# EAGLE board Schematic IOT Project v47 (EAGLE 9.7.0)
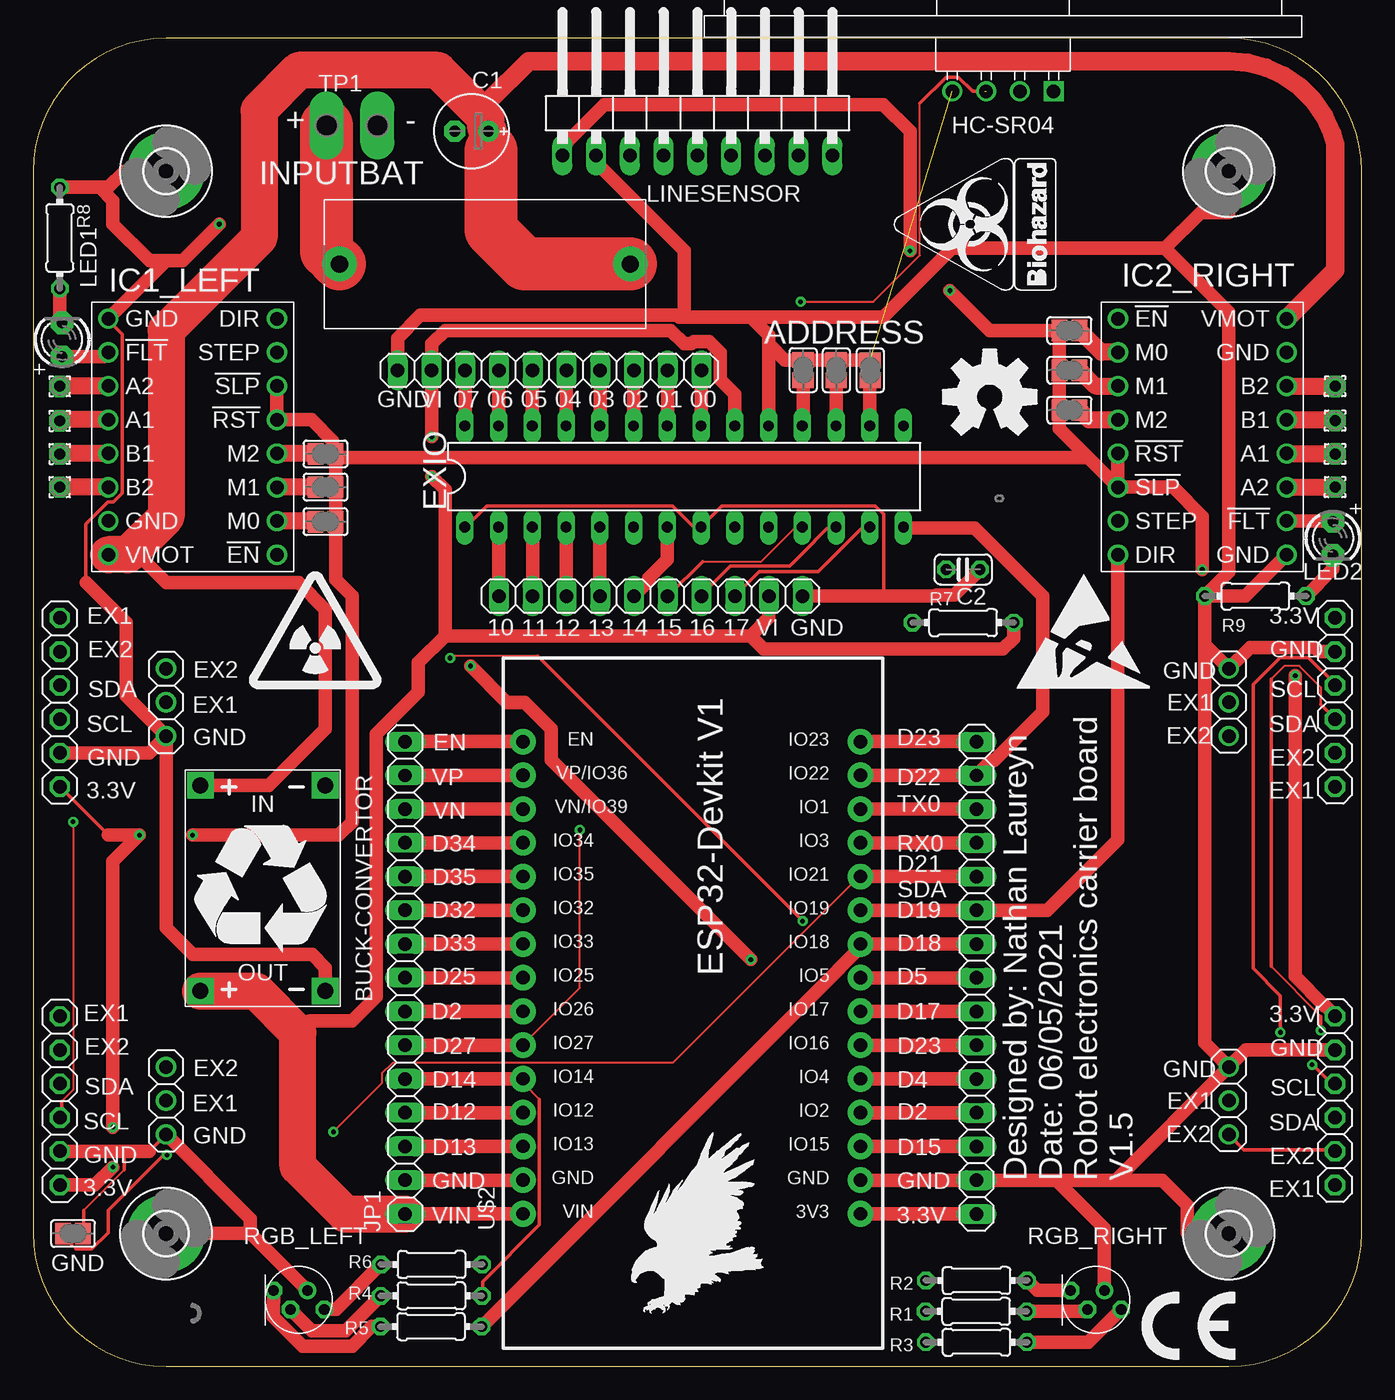
[diagram p0: board, top side]
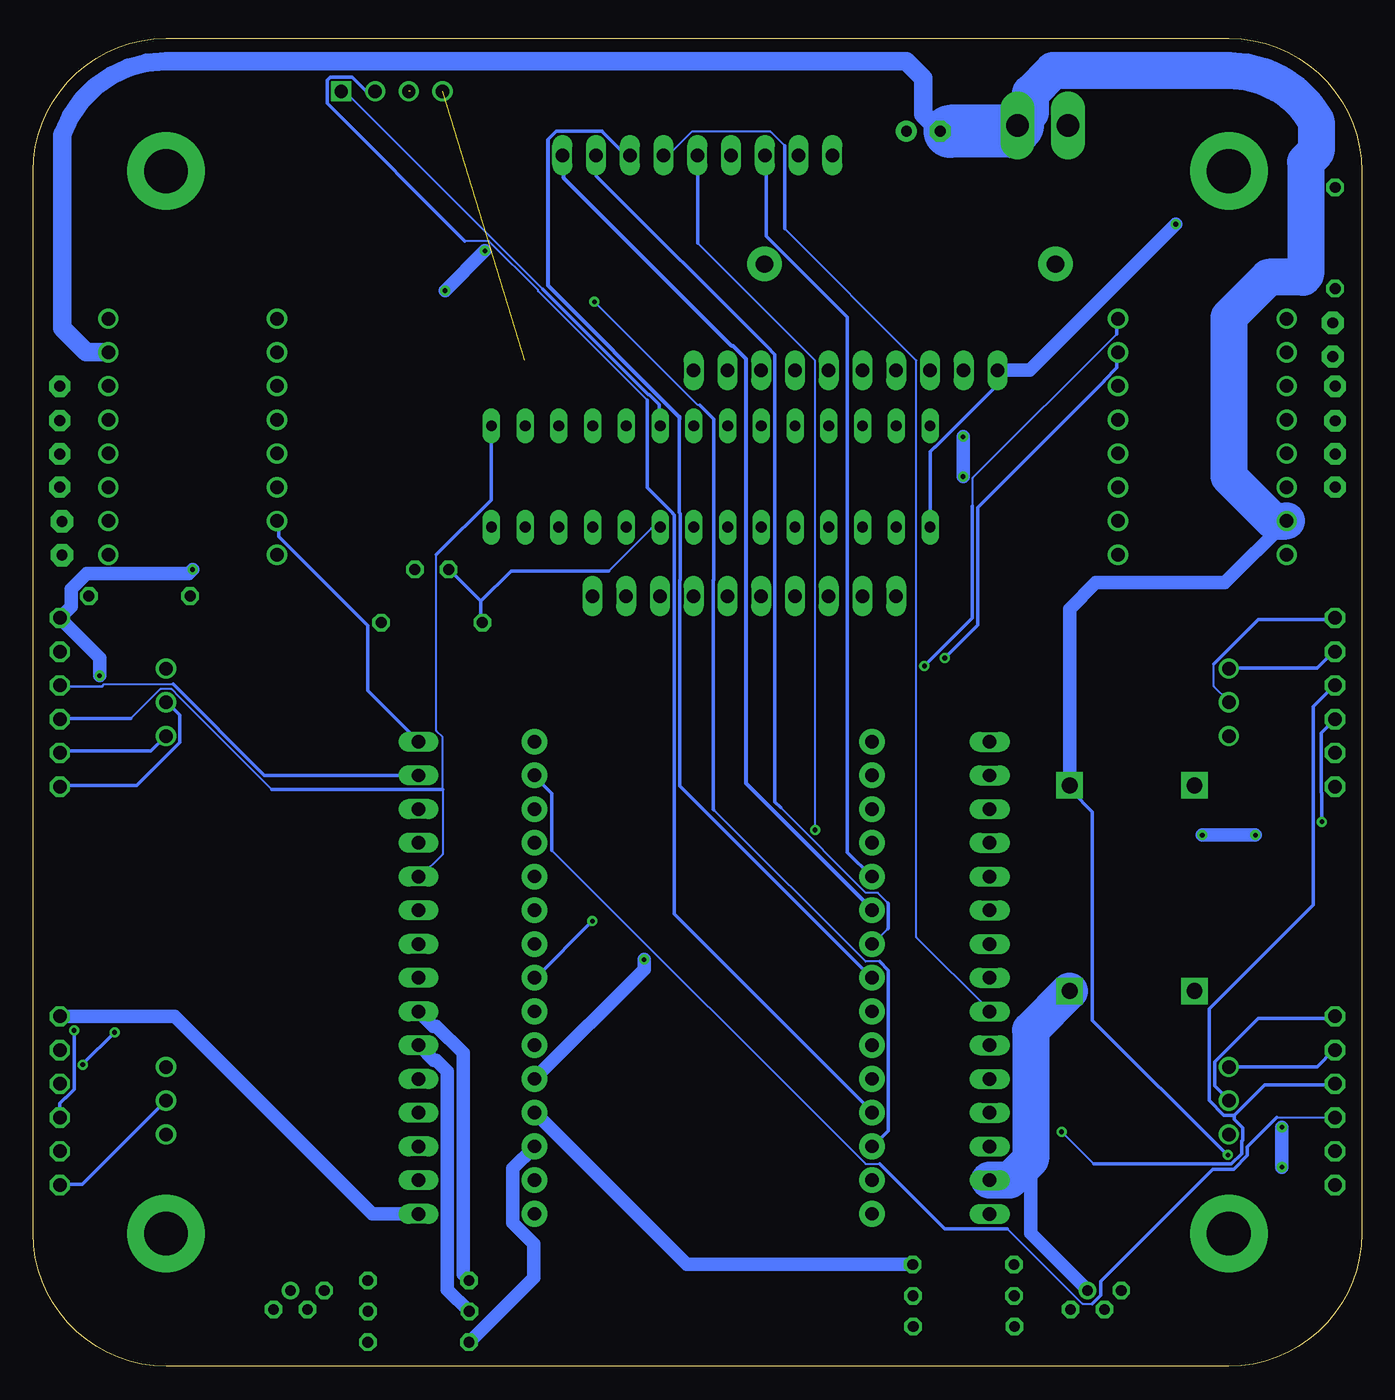
[diagram p1: board, bottom side, seen from below]

Size 100 x 100 mm. Coordinates in mm from the lower left corner, seen from the top.
Outline: 90,100 10,100 arc90 0,90 0,10 arc90 10,0 90,0 arc90 100,10 100,90 arc90 90,100
Copper layers (1*16): Top 0.035mm / dielectric 1.5mm / Bottom 0.035mm
Design rules "default": minimum track width 6mil, minimum drill 0.35mm, track to track 6mil, track to pad 6mil, pad to pad 6mil, via to via 6mil, smd to smd 6mil, copper to edge 40mil, drill to drill 6mil, minimum pad ring 10mil, minimum via ring 8mil, stop-mask expansion 4mil, vias tented up to drill 0mil, thermal gap 10mil

## Footprints (pad centres in the part's own frame; a part is rotated, then mirrored left to right if it is on the bottom)
DC-DC-STEP-DOWN-MP2307 = drill 1.2 pad 2 square: IN+ -7.747,-4.699; IN- -7.747,4.699; OUT+ 7.747,-4.699; OUT- 7.747,4.699
E2,5-6E = drill 0.813 pad 1.575: + -1.27,0 | drill 0.813 pad 1.575 octagon: - 1.27,0
C025-024X044 = drill 0.813 octagon: 1 -1.27,0; 2 1.27,0
DIL28-3 = drill 0.813 long: 1 -16.51,-3.81; 2 -13.97,-3.81; 3 -11.43,-3.81; 4 -8.89,-3.81; 5 -6.35,-3.81; 6 -3.81,-3.81; 7 -1.27,-3.81; 8 1.27,-3.81; 9 3.81,-3.81; 10 6.35,-3.81; 11 8.89,-3.81; 12 11.43,-3.81; 13 13.97,-3.81; 14 16.51,-3.81; 15 16.51,3.81; 16 13.97,3.81; 17 11.43,3.81; 18 8.89,3.81; 19 6.35,3.81; 20 3.81,3.81; 21 1.27,3.81; 22 -1.27,3.81; 23 -3.81,3.81; 24 -6.35,3.81; 25 -8.89,3.81; 26 -11.43,3.81; 27 -13.97,3.81; 28 -16.51,3.81
SJ = smd 1.168 x 1.6: 1 -0.762,0; 2 0.762,0
3,3-PAD = drill 3.3 pad 5.842: B3,3 0,0
ULTRASONIC-HC-SR04#V = drill 1 square: 1 -3.81,0 | drill 1: 2 -1.27,0; 3 1.27,0; 4 3.81,0
DRV8825 = drill 1.016: 1 -6.35,8.89; 2 -6.35,6.35; 3 -6.35,3.81; 4 -6.35,1.27; 5 -6.35,-1.27; 6 -6.35,-3.81; 7 -6.35,-6.35; 8 -6.35,-8.89; 9 6.35,-8.89; 10 6.35,-6.35; 11 6.35,-3.81; 12 6.35,-1.27; 13 6.35,1.27; 14 6.35,3.81; 15 6.35,6.35; 16 6.35,8.89
4527 = drill 1.3 pad 2.6: 1 -10.95,0; 2 10.95,0
1X15 = drill 1.016 long: 1 -17.78,0; 2 -15.24,0; 3 -12.7,0; 4 -10.16,0; 5 -7.62,0; 6 -5.08,0; 7 -2.54,0; 8 0,0; 9 2.54,0; 10 5.08,0; 11 7.62,0; 12 10.16,0; 13 12.7,0; 14 15.24,0; 15 17.78,0
1X06 = drill 1.016 octagon: 1 -6.35,0; 2 -3.81,0; 3 -1.27,0; 4 1.27,0; 5 3.81,0; 6 6.35,0
1X03 = drill 1.016: 1 -2.54,0; 2 0,0; 3 2.54,0
1X10 = drill 1.016 long: 1 -11.43,0; 2 -8.89,0; 3 -6.35,0; 4 -3.81,0; 5 -1.27,0; 6 1.27,0; 7 3.81,0; 8 6.35,0; 9 8.89,0; 10 11.43,0
LED3MM = drill 0.813 pad 1.676 octagon: A -1.27,0; K 1.27,0
1X09/90 = drill 1.016 long: 1 -10.16,-3.81; 2 -7.62,-3.81; 3 -5.08,-3.81; 4 -2.54,-3.81; 5 0,-3.81; 6 2.54,-3.81; 7 5.08,-3.81; 8 7.62,-3.81; 9 10.16,-3.81
1,6/0,8 = drill 0.813 pad 1.6 octagon: 1 0,0
0204/7 = drill 0.813 octagon: 1 -3.81,0; 2 3.81,0
LED5MMRGB = drill 0.8 pad 0.813 octagon: P$1 -1.905,0.714; P$2 -0.635,-0.714; P$4 1.905,-0.714 | drill 0.8 pad 0.813: P$3 0.635,0.714
P2-38-17 = drill 1.702 pad 2.121 long: TP-1 -1.905,0; TP-2 1.905,0
ESP32-DEVKITV1 = drill 1 pad 1.93: 3V3 -16.52,-12.27; D1 13.96,-12.27; D2 -8.9,-12.27; D3 11.42,-12.27; D4 -6.36,-12.27; D5 1.26,-12.27; D12 -8.9,13.135; D13 -11.44,13.135; D14 -6.36,13.135; D15 -11.44,-12.27; D16 -3.82,-12.27; D17 -1.28,-12.27; D18 3.8,-12.27; D19 6.34,-12.27; D21 8.88,-12.27; D22 16.5,-12.27; D23 19.04,-12.27; D25 1.26,13.135; D26 -1.28,13.135; D27 -3.82,13.135; D32 6.34,13.135; D33 3.8,13.135; D34 11.42,13.135; D35 8.88,13.135; D36 16.5,13.135; D39 13.96,13.135; EN 19.04,13.135; GND@1 -13.98,13.135; GND@2 -13.98,-12.27; VIN -16.52,13.135

## Placement (x,y rotation side)
BUCK-CONVERTOR  DC-DC-STEP-DOWN  [DC-DC-STEP-DOWN-MP2307]  17.29,36 270 top
C1  [E2,5-6E]  33,93 180 top
C2  33pF  [C025-024X044]  70,60 180 top
EXIO  MCP23016P  [DIL28-3]  49,67 0 top
GND  [SJ]  3,10 0 top
H1  MOUNT-PAD-ROUND3.3  [3,3-PAD]  10,90 0 top
H2  MOUNT-PAD-ROUND3.3  [3,3-PAD]  90,90 0 top
H3  MOUNT-PAD-ROUND3.3  [3,3-PAD]  10,10 0 top
H4  MOUNT-PAD-ROUND3.3  [3,3-PAD]  90,10 0 top
HC-SR04  ULTRASONIC-HC-SR04#V  [ULTRASONIC-HC-SR04#V]  73,96 180 top
IC1_LEFT  2987-DRV8825  [DRV8825]  12,70 180 top
IC2_RIGHT  2987-DRV8825  [DRV8825]  88,70 0 top
INPUTBAT  4527  [4527]  34,83 0 top
JP1  [1X15]  28,29.25 90 top
JP2  [1X15]  71,29.25 270 top
JP3  [1X06]  98,50 270 top
JP4  [1X03]  90,50 270 top
JP5  [1X06]  98,20 270 top
JP6  [1X03]  90,20 270 top
JP7  [1X06]  2,50 90 top
JP8  [1X03]  10,50 90 top
JP9  [1X06]  2,20 90 top
JP10  [1X03]  10,20 90 top
JP11  PINHD-1X10  [1X10]  46.48,58 180 top
JP12  PINHD-1X10  [1X10]  38.86,75 180 top
LED1  [LED3MM]  2.17,77.31 90 top
LED2  [LED3MM]  97.83,62.35 270 top
LINESENSOR  PINHD-1X9/90  [1X09/90]  50,95 0 top
PAD1  [1,6/0,8]  98,73.8 0 top
PAD2  [1,6/0,8]  98,71.21 0 top
PAD3  [1,6/0,8]  98,68.7 0 top
PAD4  [1,6/0,8]  98,66.2 0 top
PAD5  [1,6/0,8]  2,66.2 180 top
PAD6  [1,6/0,8]  2,68.7 180 top
PAD7  [1,6/0,8]  2,71.2 180 top
PAD8  [1,6/0,8]  2,73.8 180 top
R1  15Ω  [0204/7]  70.99,4.14 0 top
R2  15Ω  [0204/7]  71,6.46 0 top
R3  82Ω  [0204/7]  71,1.82 0 top
R4  15Ω  [0204/7]  29.97,5.3 180 top
R5  15Ω  [0204/7]  29.95,2.99 180 top
R6  82Ω  [0204/7]  29.99,7.66 180 top
R7  3k9Ω  [0204/7]  70,56 0 top
R8  82Ω  [0204/7]  2,84.96 270 top
R9  82Ω  [0204/7]  92,58 0 top
RGB_LEFT  5MMRGBLED  [LED5MMRGB]  20,5 0 top
RGB_RIGHT  5MMRGBLED  [LED5MMRGB]  80,5 0 top
SJ1  [SJ]  22,68.7 180 top
SJ2  [SJ]  22,66.2 180 top
SJ3  [SJ]  22,63.6 180 top
SJ4  [SJ]  78,72 0 top
SJ5  [SJ]  78,75 0 top
SJ6  [SJ]  78,78 0 top
SJ12  [SJ]  57.95,75.02 270 top
SJ13  [SJ]  60.45,75.01 270 top
SJ14  [SJ]  63,75 270 top
TP1  TP2P2-38-17  [P2-38-17]  24,93.43 0 top
U$1  [LOGO]  69,65 0 top
U$2  ESP32DEVKITV1  [ESP32-DEVKITV1]  50,28 90 top
U$3  [CE_5MM]  83.44,0.51 0 top
U$4  [BIOHAZARD_10.00]  77,81 90 top
U$5  [ESD_10.00]  74,51 0 top
U$6  [OSHW-LOGO-L]  72,73 0 top
U$7  [EAGLE-PLC-10MM]  45,4 0 top
U$8  [RADIOACTIVE_10.00]  16,51 0 top
U$9  [RECYCLING_10.00]  12,31 0 top
U$10  [LOGO02]  14,4 0 top

## Library data of the parts
BUCK-CONVERTOR HC-SR04 = diy-modules
C1 C2 = rcl; SPICEPREFIX: C
EXIO = microchip-dspic
GND SJ1-SJ6 SJ12-SJ14 = jumper
H1-H4 = holes
IC1_LEFT IC2_RIGHT = pololu-stepper-driver
INPUTBAT = Fuse Holder; CREATED_BY: PCBLayout.com; DIGIKEY_PN: 36-4527-ND; MANUFACTURER: Keystone Electronics; MPN: 4527
JP1-JP10 LED1 LED2 = adafruit
JP11 JP12 LINESENSOR = Connector; CATEGORY: CONNECTOR; SUB-CATEGORY: PIN-HEADER
PAD1-PAD8 = wirepad
R1-R9 = rcl; SPICEPREFIX: R
RGB_LEFT RGB_RIGHT = led_rgb
TP1 = testpad
U$1 = microchip
U$2 = ESP32-DEVKITV1 updated
U$3-U$5 U$7-U$9 = logo
U$6 = SparkFun-Aesthetics
U$10 = am29-memory

## Nets
+3V3: IC1_LEFT.5 IC1_LEFT.6 IC2_RIGHT.5 IC2_RIGHT.6 JP2.15 JP3.1 JP5.1 JP7.1 JP9.1 LINESENSOR.1 SJ1.1 SJ2.1 SJ3.1 SJ4.1 SJ5.1 SJ6.1 U$2.3V3
+12VF: BUCK-CONVERTOR.IN+ C1.+ IC1_LEFT.16 IC2_RIGHT.16 INPUTBAT.2
AGND: BUCK-CONVERTOR.IN- C1.- GND.1 IC1_LEFT.15 IC2_RIGHT.15 TP1.TP-2
AN: JP1.11 LINESENSOR.3 U$2.D35
CAL: LINESENSOR.4
D1: JP1.6 LINESENSOR.5 U$2.D27
D2: JP1.7 LINESENSOR.6 U$2.D26
D3: JP1.8 LINESENSOR.7 U$2.D25
D4: JP1.9 LINESENSOR.8 U$2.D33
D5: JP1.10 LINESENSOR.9 U$2.D32
ECHO_13: HC-SR04.3 JP1.3 U$2.D13
GNDIO: BUCK-CONVERTOR.OUT- C2.1 EXIO.1 EXIO.8 EXIO.19 GND.2 H1.B3,3 H2.B3,3 H3.B3,3 H4.B3,3 HC-SR04.4 IC1_LEFT.9 IC2_RIGHT.9 JP1.2 JP2.14 JP3.2 JP4.1 JP5.2 JP6.1 JP7.2 JP8.1 JP9.2 JP10.1 JP11.1 JP12.10 LINESENSOR.2 R8.1 R9.1 RGB_LEFT.P$3 RGB_RIGHT.P$3 SJ12.1 SJ13.1 SJ14.1 U$2.GND@1 U$2.GND@2
GP0.0: EXIO.21 JP12.1
GP0.1: EXIO.22 JP12.2
GP0.2: EXIO.23 JP12.3
GP0.3: EXIO.24 JP12.4
GP0.4: EXIO.25 JP12.5
GP0.5: EXIO.26 JP12.6
GP0.6: EXIO.27 JP12.7
GP0.7: EXIO.28 JP12.8
GP1.0: EXIO.2 JP11.10
GP1.1: EXIO.3 JP11.9
GP1.2: EXIO.4 JP11.8
GP1.3: EXIO.5 JP11.7
GP1.4: EXIO.7 JP11.6
GP1.5: EXIO.11 JP11.5
GP1.6: EXIO.12 JP11.4
GP1.7: EXIO.13 JP11.3
IO23: IC2_RIGHT.7 JP2.1 U$2.D23
N$1: R3.2 RGB_RIGHT.P$4
N$2: R1.2 RGB_RIGHT.P$2
N$3: IC1_LEFT.7 JP2.8 U$2.D5
N$4: IC2_RIGHT.8 JP2.6 U$2.D19
N$5: R2.2 RGB_RIGHT.P$1
N$6: IC1_LEFT.8 JP2.11 U$2.D4
N$7: R4.2 RGB_LEFT.P$2
N$8: IC1_LEFT.4 SJ1.2
N$9: IC1_LEFT.3 SJ2.2
N$10: IC1_LEFT.2 SJ3.2
N$11: R5.2 RGB_LEFT.P$1
N$12: R6.2 RGB_LEFT.P$4
N$14: IC2_RIGHT.4 SJ4.2
N$15: IC2_RIGHT.3 SJ5.2
N$16: IC2_RIGHT.2 SJ6.2
N$17: IC2_RIGHT.14 PAD1.1
N$18: IC2_RIGHT.13 PAD2.1
N$19: IC2_RIGHT.12 PAD3.1
N$20: IC2_RIGHT.11 PAD4.1
N$21: IC1_LEFT.14 PAD5.1
N$22: IC1_LEFT.13 PAD6.1
N$23: IC1_LEFT.12 PAD7.1
N$24: IC1_LEFT.11 PAD8.1
N$25: LED1.K R8.2
N$26: IC1_LEFT.10 LED1.A
N$27: LED2.K R9.2
N$28: JP2.3 U$2.D1
N$29: JP2.4 U$2.D3
N$30: IC2_RIGHT.10 LED2.A
N$31: JP1.15 U$2.EN
N$32: JP1.14 U$2.D36
N$33: JP1.13 U$2.D39
N$34: JP1.12 U$2.D34
N$36: JP5.5 JP6.3
N$37: JP5.6 JP6.2
N$38: JP3.5 JP4.3
N$40: JP3.6 JP4.2
N$41: JP7.5 JP8.3
N$42: JP7.6 JP8.2
N$44: JP9.5 JP10.3
N$45: JP9.6 JP10.2
N$54: C2.2 EXIO.9 R7.1
N$55: INPUTBAT.1 TP1.TP-1
N$56: EXIO.18 SJ12.2
N$57: EXIO.17 SJ13.2
N$58: EXIO.16 SJ14.2
RGBB1: JP2.9 R2.1 U$2.D17
RGBB2: JP2.7 R5.1 U$2.D18
RGBG1: JP2.10 R1.1 U$2.D16
RGBG2: JP1.5 R4.1 U$2.D14
RGBR1: JP2.13 R3.1 U$2.D15
RGBR2: JP2.12 R6.1 U$2.D2
SCL: EXIO.14 JP2.2 JP3.3 JP5.3 JP7.3 JP9.3 U$2.D22
SDA: EXIO.15 JP2.5 JP3.4 JP5.4 JP7.4 JP9.4 U$2.D21
TRIG_12: HC-SR04.2 JP1.4 U$2.D12
VIN: BUCK-CONVERTOR.OUT+ EXIO.20 HC-SR04.1 JP1.1 JP11.2 JP12.9 R7.2 U$2.VIN

## Tracks (layer width: path | path; a pad name or v marks a point on that pad's centre or on a via)
+3V3  (via drill 0.35)
  Top 0.254: 5.65,40 JP7.1
  Top 1: U$2.3V3 JP2.15 | v88,60 88,64 85.81,66.19 IC2_RIGHT.6 | IC2_RIGHT.6 79.42,68.42 | 79.42,68.42 77.24,70.6 SJ4.1 SJ5.1 SJ6.1 72,78 v69,81 | v66,84 66,93 64,95 43,95 39.84,91.84 LINESENSOR.1 | 79.42,68.42 23.04,68.42 SJ1.1 | SJ1.1 22.52,68.94 22.52,69.72 20.98,71.27 IC1_LEFT.5 IC1_LEFT.6 | SJ1.1 SJ2.1 SJ3.1 22.76,59.24 24,58 24,41 23,40 v12,40 | IC2_RIGHT.6 IC2_RIGHT.5 | 5.65,40 v8,40 6,38 v6,18 | JP9.1 4.65,13.65 v6,15
  Top 1.016: v95,52 95,29.35 97.2,27.15 97.25,27.15 97.71,26.69 97.71,26.64 JP5.1
  Bottom 1: JP2.15 74.47,11.47 89.35,26.35 JP5.1 | v95,52 95,53.35 JP3.1 97.12,57.23 97.12,58.54 95.97,59.7 88.3,59.7 v88,60 | v69,81 v66,84 | v12,40 v8,40 | v6,15 v6,18
+12VF
  Top 0.152: 34.44,91.56 34.44,91.75 C1.+
  Top 1: IC1_LEFT.16 7.89,61.11 10,59 20,59 22,57 22,48 17.75,43.75 BUCK-CONVERTOR.IN+
  Top 1.4: C1.+ 34.27,95.27 37.28,98.28 90,98.28 91.44,98.16 92.83,97.78 94.14,97.17 95.33,96.35 96.35,95.33 97.17,94.14 97.78,92.83 98,92.03 98,86 98,82.54 IC2_RIGHT.16
  Top 2.8: IC1_LEFT.16 7.11,61.11 10,64 10,78 17,85 17,94.58 20,97.58 30.45,97.58 34.07,93.97 34.07,93.2 C1.+
  Top 4: INPUTBAT.2 37,83 34.44,85.56 34.44,91.56
AGND  (via drill 0.35)
  Top 0.152: 3.2,8.84 2.9,9.14 | 2.29,9.91 GND.1 | 9.75,15.85 10.01,15.85 v10.07,15.91
  Top 0.254: 2.29,9.91 2.9,9.3 2.9,9.14 | 3.2,8.84 4.42,8.84 5.64,10.06 5.64,11.73 9.75,15.85
  Bottom 0.152: BUCK-CONVERTOR.IN- 21.79,43.28 | 31,93 31.09,92.96 C1.-
  Bottom 0.254: 21.79,43.28 20.27,41.76 20.27,26.06 10.12,15.91 v10.07,15.91
  Bottom 1: IC1_LEFT.15 10.3,59 20,59 21.98,57.02 BUCK-CONVERTOR.IN-
  Bottom 1.4: C1.- 33,94.27 33,97 34.28,98.28 90,98.28 91.44,98.16 92.83,97.78 94.14,97.17 95.33,96.35 96.35,95.33 97.17,94.14 97.78,92.83 97.82,92.69 | 97.82,92.69 | 97.82,92.69 97.82,78.18 96,76.35 IC2_RIGHT.15
  Bottom 2.8: TP1.TP-2 24.92,94.41 24.92,95.88 23.22,97.58 10,97.58 8.68,97.47 7.41,97.13 6.21,96.57 5.12,95.81 4.19,94.88 3.43,93.79 3.43,91.47 4.21,90.69 4.21,82.2 4.42,82 7,82 10,79 10,67 6.65,63.65 IC1_LEFT.15
  Bottom 4: TP1.TP-2 26.34,93 31,93
AN
  Top 1: U$2.D35 JP1.11
  Bottom 0.152: 44.81,91.14 LINESENSOR.3 | U$2.D35 36.88,36.88
  Bottom 0.254: 36.88,36.88 38.71,38.71 38.71,78.99 44.81,85.09 44.81,91.14
D1  (via drill 0.35)
  Top 0.152: v41.15,40.39 41.15,28.5 37.19,24.54 U$2.D27
  Top 1: U$2.D27 JP1.6
  Bottom 0.152: 49.99,84.58 41.15,75.74 v41.15,40.39 | 49.99,91.14 LINESENSOR.5
  Bottom 0.254: 49.99,84.58 49.99,91.14
D2
  Top 1: U$2.D26 JP1.7
  Bottom 0.152: 52.12,91.29 50.44,92.96 44.5,92.96 43.43,91.9 | 43.43,85.65 33.53,75.74 33.53,32.31 28.04,26.82 JP1.7 | 52.43,91.29 LINESENSOR.6
  Bottom 0.254: 52.12,91.29 52.43,91.29 | 43.43,85.65 43.43,91.9
D3
  Top 1: U$2.D25 JP1.8
  Bottom 0.152: 55.47,91.29 55.17,91.29 LINESENSOR.7 | 36.88,29.26 U$2.D25
  Bottom 0.254: 55.47,91.29 57.15,92.96 57.18,92.99 60.63,92.99 61.27,92.35 | 51.36,71.35 51.36,64.28 51.31,64.23 51.31,59.22 51.33,59.19 51.33,43.71 36.88,29.26
  Bottom 0.305: 61.27,92.35 61.27,81.4 51.36,71.49 51.36,71.35
D4
  Top 1: U$2.D33 JP1.9
  Bottom 0.152: 43.74,42.06 37.34,35.66 36.42,35.66 35.66,34.9 | 35.66,32.92 36.73,31.85 U$2.D33 | 57.61,91.14 LINESENSOR.8
  Bottom 0.254: 57.61,91.14 57.61,89.61 44.8,76.8 44.78,76.8 44.17,76.19 44.17,42.49 43.74,42.06 | 35.66,32.92 35.62,32.96 35.62,34.86 35.66,34.9
D5
  Top 1.016: U$2.D32 36.85,34.33 JP1.10
  Bottom 0.305: LINESENSOR.9 60.05,91.14 60.05,89.46 47.42,76.83 47.31,76.83 46.33,75.85 46.33,43.89 36.88,34.44 U$2.D32
ECHO_13  (via drill 0.35)  (1 unrouted)
  Top 0.152: 66.75,95.1 66.75,83.67 63.25,80.16 v57.76,80.16
  Top 0.254: 71.63,96.01 70.71,96.01 69.65,97.08 68.73,97.08 66.75,95.1
  Top 1: JP1.3 36.85,16.55 U$2.D13
  Bottom 0.152: v57.76,80.16 49.99,72.39 49.84,72.39 | 48.77,41.91 37.34,30.48 36.27,30.48 | U$2.D13 36.73,16.61
  Bottom 0.254: 49.84,72.39 48.77,71.32 48.77,59.22 48.79,59.19 48.79,41.94 48.77,41.91 | 36.27,30.48 35.62,29.83 35.62,17.72 36.73,16.61
GNDIO  (via drill 0.35)  (1 unrouted)
  Top 0.152: 71.17,59.89 C2.1 | 57.91,58.06 JP11.1 | 6.86,14.78 3.81,11.73 | 3.81,10.06 GND.2 | EXIO.1 32.61,63.25 | 3.96,59.44 4,59 | IC1_LEFT.9 5.94,78.49 | EXIO.8 50.29,63.25 | 86.88,10.06 89.92,10.06 H4.B3,3 | H3.B3,3 10.06,10.06 12.65,10.06 13.12,10 | H1.B3,3 9.91,90.07 7.32,90.07 6.88,90 | H2.B3,3 90.07,89.92 90.07,87.33 90,86.88
  Top 0.254: 8.73,16.19 JP10.1 | 57.91,58.06 64.01,58.06 | 64.01,58.06 68,58.06 | 3.81,11.73 3.81,10.06 | 6.86,16.19 6.86,14.78 | 32.61,63.25 34.16,64.79 48.14,64.79 49.68,63.25 50.14,63.25 EXIO.8 | 5.94,78.49 6.71,77.72 6.71,65.77 6.01,65.08 5.6,65.08 3.96,63.44 3.96,59.44 | 64.01,58.06 64.01,64.16 63.38,64.79 51.84,64.79 50.29,63.25
  Top 1: U$2.GND@2 JP2.14 77,14.01 | JP1.2 36.85,14.01 U$2.GND@1 | IC2_RIGHT.9 91.24,58 R9.1 | R9.1 88.19,54.35 | 88.19,54.35 JP4.1 91.59,54.13 96.47,54.13 96.8,53.81 JP3.2 | 77,14.01 81.47,14.01 | 81.47,14.01 JP6.1 | 81.47,14.01 84.99,14.01 86.88,12.12 86.88,10.06 | RGB_RIGHT.P$3 80.64,10.38 77,14.01 | JP6.1 91.27,23.81 JP5.2 | 16.35,10 RGB_LEFT.P$3 | JP10.1 16.35,11.11 16.35,10 | 8.73,16.19 6.86,16.19 JP9.2 | BUCK-CONVERTOR.OUT- 21.98,30.02 21,31 12,31 10,33 JP8.1 | JP8.1 8.73,46.19 JP7.2 | JP8.1 7,50.46 7,56 4,59 | 10,83.24 IC1_LEFT.9 | JP12.10 27.43,77.43 29.15,79.15 48.48,79.15 48.63,79 49,79 | 49,79 54,79 | 54,79 55.35,77.65 55.35,77 | 55.35,77 EXIO.19 | 55.35,77 56.57,75.78 SJ12.1 SJ13.1 62.99,75.77 SJ14.1 | 49,79 49,84 42.38,90.62 LINESENSOR.2 | 54,79 64,79 69.19,84.19 85.19,84.19 | R9.1 90,59.81 90,79.38 85.19,84.19 | 10,83.24 11.24,83.24 v14,86 | 88.19,54.35 88.19,24.35 JP6.1 | 16.35,10 13.12,10 | R8.1 5,88.77 | 5,88.77 5.66,88.77 6.88,90 | 5,88.77 6,87.77 6,86 8.76,83.24 10,83.24 | 85.19,84.19 87.88,86.88 90,86.88
  Top 1.016: JP11.1 67.94,58 68,58.06 69.34,58.06 71.17,59.89
  Bottom 0.152: 27.58,73.76 27.58,74.52 JP12.10 | 32.46,63.25 EXIO.1
  Bottom 0.254: 32.46,63.25 32.46,68.89 32.14,69.21 32.1,69.21 27.58,73.73 27.58,73.76
  Bottom 1: RGB_LEFT.P$3 24.92,10 24.92,15.59 | JP12.10 25,75 v14,86
  Bottom 2.8: BUCK-CONVERTOR.OUT- 24.92,25.31 24.92,15.59 26.5,14.01 JP1.2
GP0.0
  Top 1: 50.27,74.98 JP12.1
  Top 1.016: EXIO.21 50.27,74.98
GP0.1
  Top 1: EXIO.22 47.75,70.83 JP12.2
GP0.2
  Top 1: EXIO.23 45.19,74.98 JP12.3
GP0.3
  Top 1: EXIO.24 42.67,70.83 JP12.4
GP0.4
  Top 1: EXIO.25 40.11,74.98 JP12.5
GP0.5
  Top 1: EXIO.26 37.57,74.98 JP12.6
GP0.6
  Top 1: EXIO.27 35.03,74.98 JP12.7
GP0.7
  Top 1: JP12.8 32.51,70.83 EXIO.28
GP1.0
  Top 1: EXIO.2 35.03,58.02 JP11.10
GP1.1
  Top 1: EXIO.3 37.59,63.17 JP11.9
GP1.2
  Top 1: EXIO.4 40.11,58.02 JP11.8
GP1.3
  Top 1: EXIO.5 42.65,58.02 JP11.7
GP1.4
  Top 1.016: JP11.6 46.33,59.12 46.33,59.35 47.73,60.75 EXIO.7
GP1.5
  Top 0.152: EXIO.11 57.76,63.09 57.3,63.09 54.81,60.6 50.39,60.6 | JP11.5 47.85,58.06
  Top 0.254: 47.85,58.06 50.39,60.6
GP1.6
  Top 0.152: 59.74,63.09 60.35,63.09 EXIO.12 | JP11.4 50.29,58.06
  Top 0.254: 50.29,58.06 52.48,60.25 56.9,60.25 56.94,60.25 58.83,62.14 58.83,62.18 59.74,63.09
GP1.7
  Top 0.152: 62.33,63.09 62.94,63.09 EXIO.13 | 52.88,58.06 JP11.3
  Top 0.254: 52.88,58.06 54.66,59.84 59.08,59.84 62.33,63.09
IO23
  Top 0.406: JP2.1
  Top 1: U$2.D23 JP2.1
  Bottom 0.152: 71.02,47.09 JP2.1
  Bottom 0.254: 71.02,47.09 74.83,50.9 74.83,55.78 81.53,62.48 81.53,63.55 IC2_RIGHT.7
N$1
  Top 1: R3.2 79.44,1.82 RGB_RIGHT.P$4
N$2
  Top 1: R1.2 79.22,4.14 RGB_RIGHT.P$2
N$3  (via drill 0.35)
  Top 0.152: v31.39,53.33 31.52,53.47 37.97,53.47
  Top 0.254: 37.97,53.47 v57.91,33.53
  Top 1: U$2.D5 JP2.8
  Bottom 0.152: 18.44,76.2 IC1_LEFT.7 | 62.18,29.26 U$2.D5
  Bottom 0.254: 62.18,29.26 v57.91,33.53 | 18.44,76.2 18.44,75.19 19.39,74.24 19.39,74.18 28.91,64.67 28.91,55.83 31.39,53.35 v31.39,53.33
N$4
  Top 1: U$2.D19 JP2.6
  Top 1.016: JP2.6 76.33,34.33 81.65,39.65 IC2_RIGHT.8
N$5
  Top 1: R2.2 75.56,5.71 RGB_RIGHT.P$1
N$6  (via drill 0.35)
  Top 1: U$2.D4 JP2.11
  Top 1.016: v54.02,30.63 39,45.65 39,48 37,50 35.65,50 v32.92,52.73
  Bottom 0.152: 18.44,77.72 29.26,66.9 29.26,64.82 29.31,64.77 | 18.44,78.79 IC1_LEFT.8
  Bottom 0.254: 18.44,77.72 18.44,78.79 | v32.92,52.73 29.31,56.34 29.31,64.77
  Bottom 1.016: U$2.D4 54.02,29.89 v54.02,30.63
N$7
  Top 1: R4.2 23.53,2.67 20.98,2.67 RGB_LEFT.P$2
N$8
  Top 1.27: IC1_LEFT.4 21.21,68.73 SJ1.2
N$9
  Top 1.27: IC1_LEFT.3 21.23,66.19 SJ2.2
N$10
  Top 1.27: IC1_LEFT.2 21.19,63.65 SJ3.2
N$11
  Top 1: R5.2 25.49,3 24.01,1.52 20.29,1.52 18.06,3.74 18.06,4.83 18.09,4.86 RGB_LEFT.P$1
N$12
  Top 1: R6.2 22.8,4.29 RGB_LEFT.P$4
N$14
  Top 1.27: IC2_RIGHT.4 79.49,71.27 SJ4.2
N$15
  Top 1.27: IC2_RIGHT.3 79.95,73.81 SJ5.2
N$16
  Top 1.27: IC2_RIGHT.2 80.41,76.35 SJ6.2
N$17
  Top 1.27: IC2_RIGHT.14 PAD1.1
N$18
  Top 1.27: IC2_RIGHT.13 97.94,71.27 PAD2.1
N$19
  Top 1.27: IC2_RIGHT.12 97.97,68.73 PAD3.1
N$20
  Top 1.27: IC2_RIGHT.11 PAD4.1
N$21
  Top 1.27: IC1_LEFT.14 PAD5.1
N$22
  Top 1.27: IC1_LEFT.13 2.03,68.73 PAD6.1
N$23
  Top 1.27: IC1_LEFT.12 2.07,71.27 PAD7.1
N$24
  Top 1.27: IC1_LEFT.11 PAD8.1
N$25
  Top 1: LED1.K 2,78.75 R8.2
N$26
  Top 1: IC1_LEFT.10 5.33,76.03 LED1.A
N$27
  Top 1: LED2.K 97.83,60.02 R9.2
N$28
  Top 1: U$2.D1 JP2.3
N$29
  Top 1: U$2.D3 JP2.4
N$30
  Top 1: IC2_RIGHT.10 97.8,63.65 LED2.A
N$31
  Top 0.152: JP1.15 28.04,47.09 28.04,47.04
  Top 1: 28.04,47.04 U$2.EN
N$32
  Top 1: U$2.D36 JP1.14
N$33
  Top 1: U$2.D39 JP1.13
N$34
  Top 1: U$2.D34 JP1.12
N$36
  Top 0.152: 97.99,16.31 JP5.5 | 90.07,17.37 JP6.3
  Top 0.254: 97.99,16.31 91.14,16.31 90.07,17.37
N$37
  Bottom 0.152: 97.99,13.72 JP5.6 | 90.07,19.96 JP6.2
  Bottom 0.254: 97.99,13.72 96.32,13.72 90.07,19.96
N$38
  Bottom 0.152: 97.99,46.33 JP3.5 | 90.07,47.4 JP4.3
  Bottom 0.254: 97.99,46.33 91.14,46.33 90.07,47.4
N$40
  Bottom 0.152: 97.99,43.74 JP3.6 | JP4.2 89.92,49.99
  Bottom 0.254: 97.99,43.74 92.2,43.74 88.96,46.98 88.96,49.03 89,49.07 89.92,49.99
N$41
  Bottom 0.152: 9.91,52.58 JP8.3 | 2.13,53.8 JP7.5
  Bottom 0.254: 9.91,52.58 3.35,52.58 2.13,53.8
N$42
  Bottom 0.152: 11.12,52.88 11.12,51.21 10.06,50.14 JP8.2 | 2.13,56.24 JP7.6
  Bottom 0.254: 2.13,56.24 7.77,56.24 7.78,56.24 11.12,52.89 11.12,52.88
N$44
  Bottom 0.152: 9.91,22.55 JP10.3 | 2.13,23.77 JP9.5
  Bottom 0.254: 9.91,22.55 3.35,22.55 2.13,23.77
N$45
  Bottom 0.152: 2.13,26.21 JP9.6 | JP10.2 10,20.06
  Bottom 0.254: 10,20.06 11.07,21.13 11.07,22.91 11.07,22.94 7.8,26.21 2.13,26.21
N$54
  Bottom 0.152: 66.29,56.08 R7.1 | 68.58,59.89 C2.2 | 56.69,59.89 53.49,63.09 52.88,63.09 EXIO.9
  Bottom 0.254: 66.29,57.61 66.29,56.08 | 68.58,59.89 66.29,57.61 | 56.69,59.89 64.01,59.89 66.29,57.61
N$55
  Top 4: TP1.TP-1 22.09,83.95 INPUTBAT.1
N$56
  Top 1: EXIO.18 57.95,70.87 SJ12.2
N$57
  Top 1: SJ13.2 60.45,70.83 EXIO.17
N$58
  Top 1: EXIO.16 62.97,74.21 SJ14.2
RGBB1
  Top 1: U$2.D17 JP2.9
  Bottom 1.016: R2.1 67.65,6.91 67.65,23.59 69.65,25.59 69.88,25.59 JP2.9
RGBB2
  Top 1: U$2.D18 JP2.7
  Top 1.016: R5.1 60.64,29.88 60.64,29.93 62.27,31.56 U$2.D18
RGBG1
  Top 1: U$2.D16 JP2.10
  Bottom 0.152: 70.92,24.12 JP2.10
  Bottom 1.016: 70.92,24.12 69.86,23.05 69.65,23.05 68.82,22.22 68.82,5.78 R1.1
RGBG2
  Top 0.152: 38.1,20.12 37.03,21.18 U$2.D14 | 33.83,5.33 R4.1
  Top 0.254: 33.83,5.33 33.83,6.37 38.11,10.65 38.11,20.11 38.1,20.12
  Top 1: U$2.D14 JP1.5
RGBR1
  Top 1: U$2.D15 JP2.13
  Bottom 0.152: 62.33,16.46 U$2.D15
  Bottom 1.016: R3.1 62.33,6.68 62.33,9.24 63.9,10.81 63.9,14.89 62.33,16.46
RGBR2
  Top 1: U$2.D2 JP2.12
  Bottom 0.152: U$2.D2 62.18,19.05
  Bottom 1.016: R6.1 50.79,7.66 62.18,19.05
SCL  (via drill 0.35)
  Top 0.152: 2.13,18.75 JP9.3 | 65.53,63.12 EXIO.14 | JP3.3 97.99,51.36 | v3,41 3,20.83 2.13,19.96
  Top 0.254: 2.13,19.96 2.13,18.75 | JP5.3 97.99,21.34 97.69,21.34 96.32,22.71 v96.27,22.71 | v93.88,25.15 93.88,27.91 91.83,29.96 91.83,51.33 93.85,53.36 96,53.36 97.99,51.36
  Top 1: U$2.D22 JP2.2
  Top 1.016: JP2.2 72.12,45.61 72.35,45.61 76,49.26 76,58 70.88,63.12 65.53,63.12
  Bottom 0.152: JP7.3 2.13,48.62 | 89.46,51.36 94.64,51.36 94.79,51.21 | 71.02,44.5 JP2.2 | JP3.3 97.99,51.21 | 6.4,18.75 2.13,18.75 JP9.3 | 20.27,4.72 21.03,4.72 26.67,10.36 | 36.27,15.24 37.34,15.24 60.96,38.86 | U$2.D22 62.18,44.35
  Bottom 0.2: 97.99,51.21 94.79,51.21
  Bottom 0.254: 20.27,4.72 19.66,5.33 19.66,6.4 11.22,14.84 9.64,14.84 8.6,15.87 8.6,16.54 6.4,18.75 | 26.67,10.36 31.39,10.36 36.27,15.24 | 60.96,38.86 60.96,43.13 62.18,44.35 | 2.13,48.62 3.04,47.71 3.04,43.22 3,43.18 v3,41 | 71.02,44.5 82.6,44.5 89.45,51.36 89.46,51.36 | v93.88,25.15 96.27,22.76 v96.27,22.71
SDA  (via drill 0.35)
  Top 0.152: 93.18,30.11 96.93,26.36 | 97.99,48.77 JP3.4 | 61.87,36.58 48.16,22.86 27.07,22.86 26.25,22.04 26.25,21.31 v22.59,17.65 | 93.18,51.74 94.18,52.74 95.31,52.74 96.93,51.12 96.93,51
  Top 0.2: 96.93,51 96.93,49.84
  Top 0.254: 96.93,26.36 v96.93,25.3 | 96.93,49.84 97.99,48.77 | 93.18,30.11 93.18,51.74
  Top 1: U$2.D21 JP2.5
  Top 1.016: U$2.D21 61.87,36.58
  Bottom 0.152: 2.13,21.18 JP9.4 | JP7.4 2.13,51.21 | 97.99,18.75 JP5.4 | 69.65,61.11 69.65,47.85 69.19,47.4 69.19,43.43 69.19,38.56 70.87,36.88 JP2.5 | 65.53,70.71 EXIO.15 | 97.99,48.77 JP3.4 | v22.59,17.65 20.18,15.24 | 9.04,16.61 9.01,16.64 | 82.04,43.43 89.01,50.41 89.59,50.99 90.44,50.99 92.66,48.77
  Bottom 0.254: 2.13,21.18 7.32,21.18 9.6,18.9 | 2.13,51.21 3.66,49.68 3.66,34.75 11.48,26.92 11.48,20.01 10.37,18.9 9.6,18.9 | 97.99,18.75 97.99,19.81 97.58,20.23 97.57,20.23 96.93,20.87 v96.93,25.3 | 65.53,70.71 65.53,65.23 69.65,61.11 | 92.66,48.77 97.99,48.77 | 9.6,18.9 9.6,18.59 8.96,17.95 8.96,17.03 9.01,16.98 9.01,16.64 | 20.18,15.24 9.81,15.24 9.04,16.01 9.04,16.61 | 69.19,43.43 82.04,43.43
TRIG_12
  Top 1: U$2.D12 36.85,19.09 JP1.4
  Bottom 0.152: 74.37,96.01 HC-SR04.2 | U$2.D12 36.88,19.2 | 67.51,84.73 65.7,84.73 62,81.03 62,80.95 53.8,72.75
  Bottom 0.254: 67.51,84.73 77.88,95.1 77.88,96.84 77.63,97.08 75.99,97.08 74.92,96.01 74.37,96.01 | 36.88,19.2 51.71,34.04 51.74,34.06 51.74,64.08 51.87,64.22 51.87,64.24 53.8,66.17 53.8,72.75
VIN  (via drill 0.35)
  Top 1: U$2.VIN 36.85,11.47 JP1.1 | 19.92,25.12 20.81,26 24,26 25.82,27.82 25.82,47.62 29,50.79 29,53 31,55 | 31,55 54,55 | 54,55 55.37,56.37 JP11.2 | v30,70 30,74.97 JP12.9 30,75.03 30,77 31,78 48,78 49,77 49.53,77 49.71,77.18 50.88,77.18 51.71,76.35 51.71,74.29 52.81,73.19 EXIO.20 | v30,67 31,66 31,55 | 54,55 55,54 73,54 73.81,54.81 R7.2
  Top 2.8: BUCK-CONVERTOR.OUT+ 16.79,28.25 19.92,25.12 19.92,15.05 23.5,11.47 JP1.1
  Bottom 0.152: HC-SR04.1 76.81,95.86 76.4,95.86 61.65,81.11 61.65,81.1 | EXIO.20 52.88,70.87
  Bottom 0.254: 52.88,70.87 52.88,72.33 52.88,72.41 53.63,73.15 53.7,73.15 61.65,81.1
  Bottom 1: v30,70 v30,67

## Text on the board
tNames: + | - | ADDRESS | GND | VI | 07 | 06 | 05 | 04 | 03 | 02 | 01 | 00 | EX1 | 3.3V | 10 | 11 | 12 | 13 | 14 | 15 | 16 | 17 | VI | GND | EX2 | GND | EX2 | GND | SDA | SCL | EX1 | EX1 | SCL | SDA | GND | EN | D23 | EX2 | GND | EX2 | VP | D22 | 3.3V | EX1 | TX0 | VN | D34 | RX0 | D21 / SDA | D35 | D32 | D19 | D33 | D18 | D25 | D5 | EX1 | D2 | D17 | 3.3V | EX2 | D27 | D23 | GND | EX2 | GND | SDA | D14 | D4 | SCL | EX1 | EX1 | D12 | D2 | SCL | SDA | GND | EX2 | GND | D13 | D15 | EX2 | GND | GND | 3.3V | Designed by: Nathan Laureyn / Date: 06/05/2021 / Robot electronics carrier board / V1.5 | EX1 | VIN | 3.3V